# EAGLE board middleman pcb (EAGLE 9.5.0)
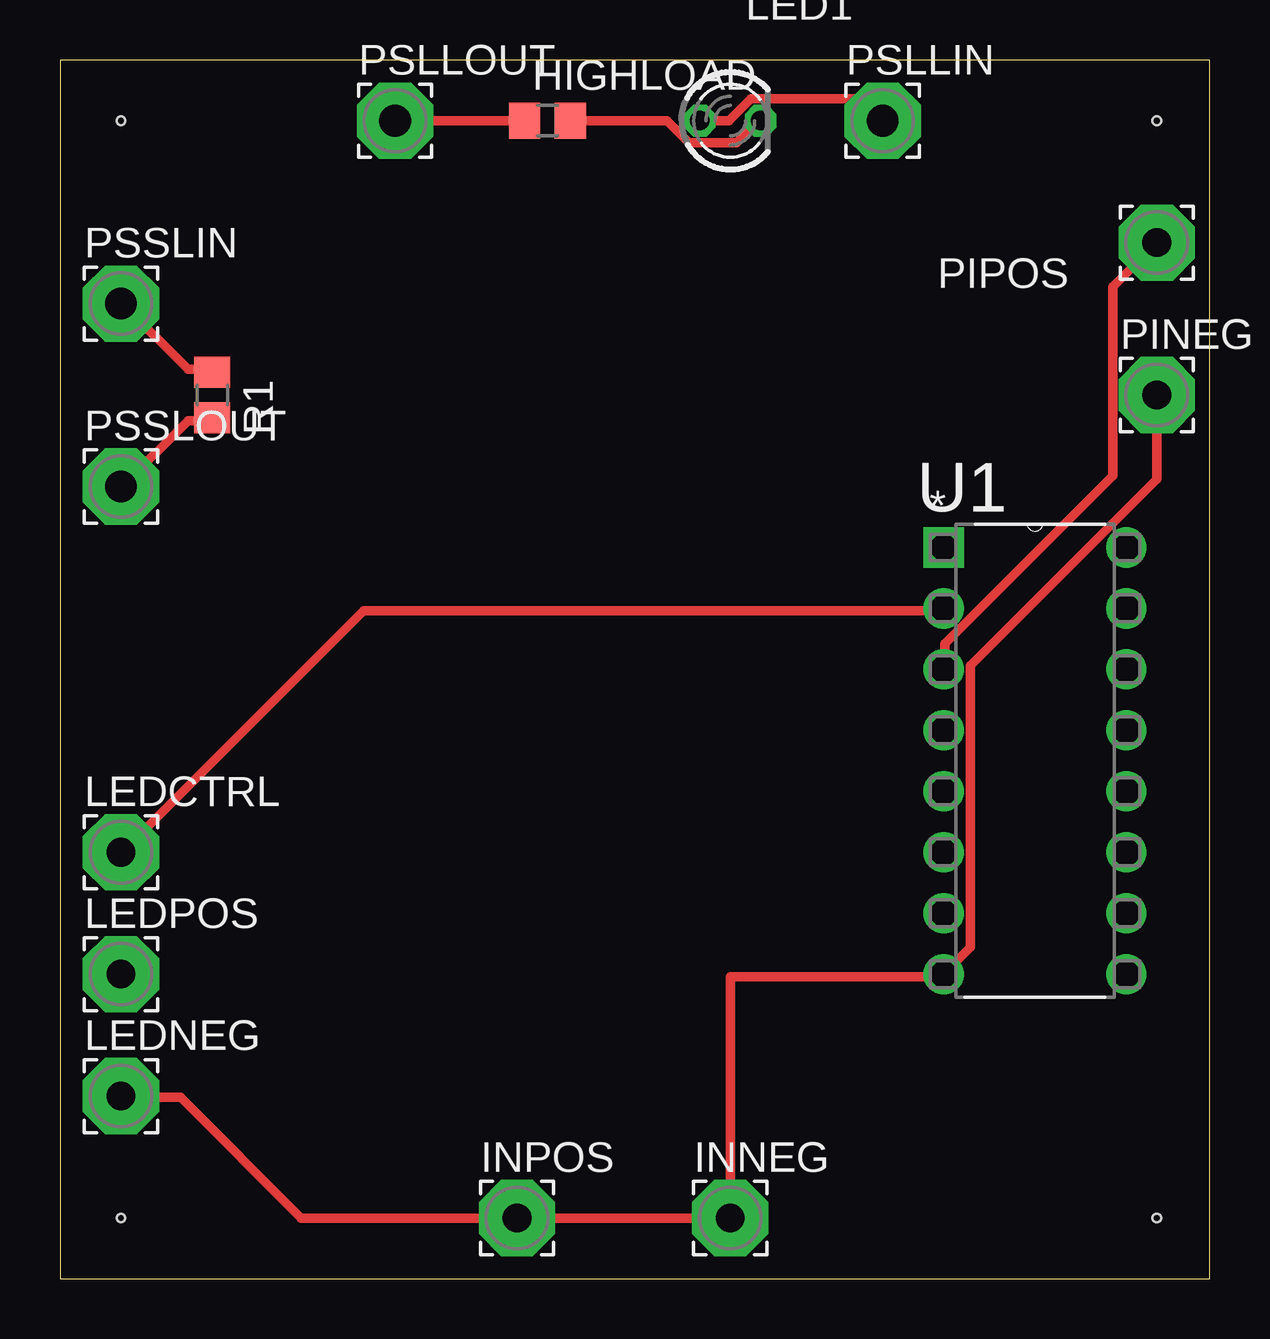
[diagram p0: board, top side]
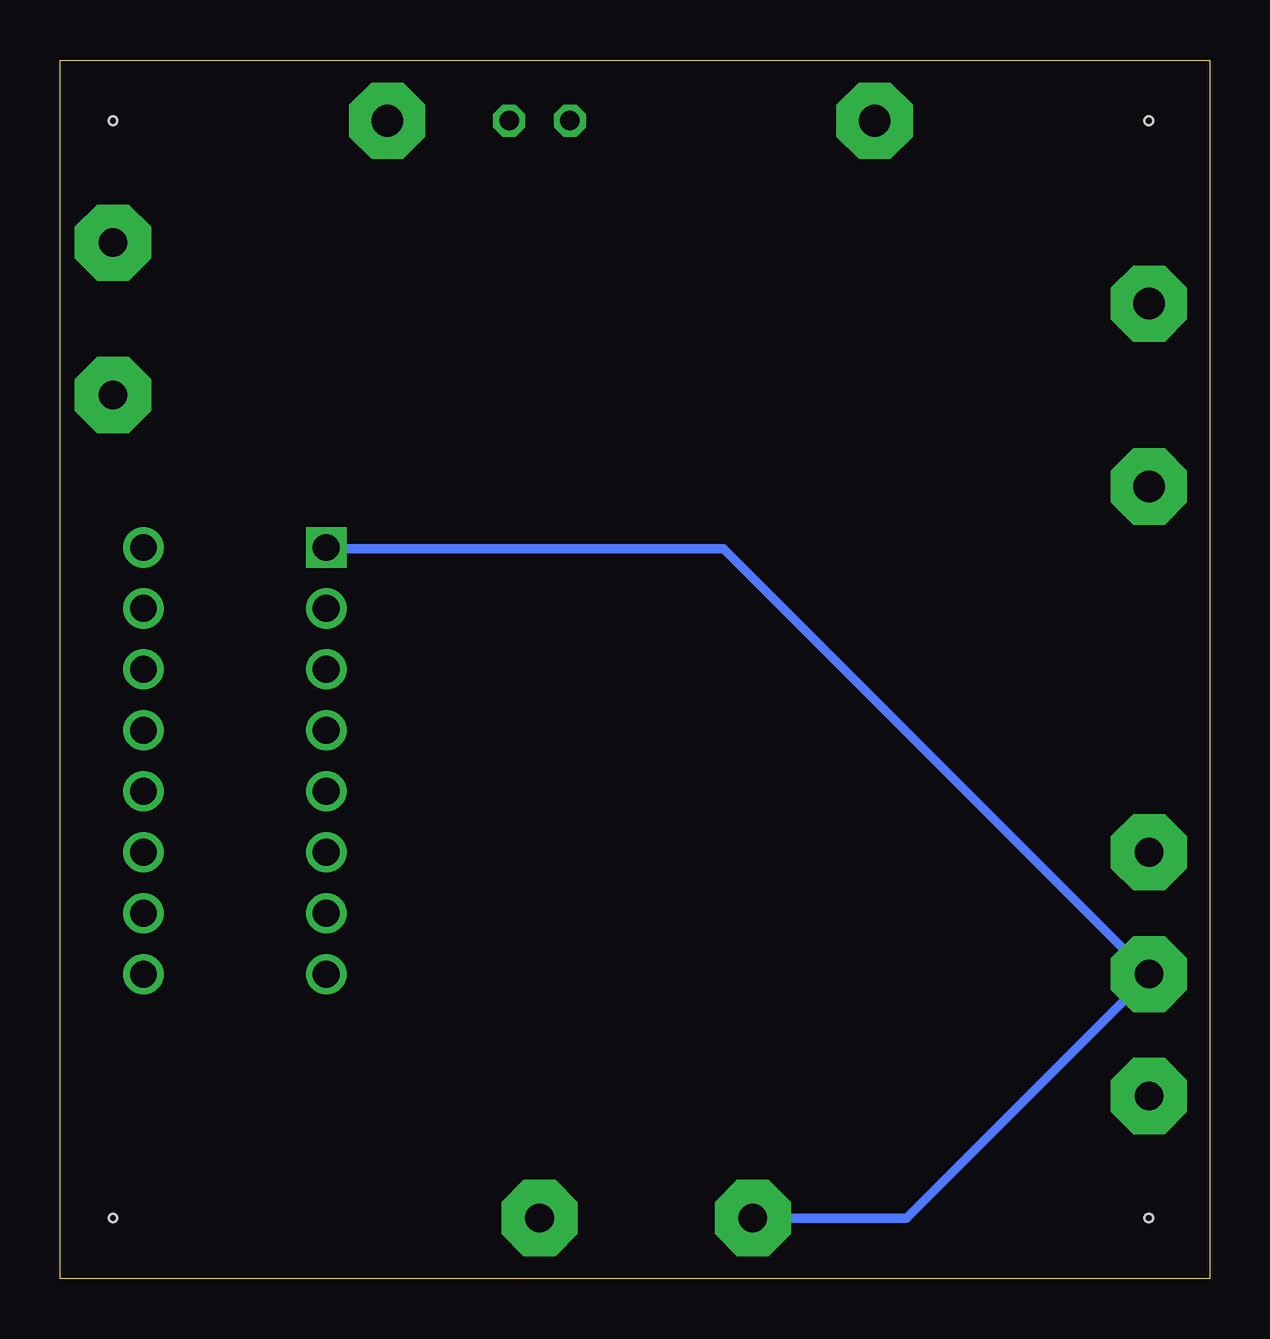
[diagram p1: board, bottom side, seen from below]

Size 47.93 x 50.79 mm. Coordinates in mm from the lower left corner, seen from the top.
Outline: 0,0 47.93,0 47.93,50.79 0,50.79 0,0
Copper layers (1*16): Top 0.035mm / dielectric 1.5mm / Bottom 0.035mm
Design rules "default": minimum track width 6mil, minimum drill 0.35mm, track to track 6mil, track to pad 6mil, pad to pad 6mil, via to via 6mil, smd to smd 6mil, copper to edge 40mil, drill to drill 6mil, minimum pad ring 10mil, minimum via ring 8mil, stop-mask expansion 4mil, vias tented up to drill 0mil, thermal gap 10mil
Holes 0.35 mm at 2.54,48.26 45.72,48.26 45.72,2.54 2.54,2.54

## Footprints (pad centres in the part's own frame; a part is rotated, then mirrored left to right if it is on the bottom)
R0805 = smd 1.3 x 1.5: 1 -0.95,0; 2 0.95,0
3,17/1,2 = drill 1.194 pad 3.175 octagon: 1 0,0
LED3MM = drill 0.813 octagon: A -1.27,0; K 1.27,0
3,17/1,3 = drill 1.321 pad 3.175 octagon: 1 0,0
DIP254P762X508-16 = drill 1.118 square: 1 -7.62,17.78 | drill 1.118: 2 -7.62,15.24; 3 -7.62,12.7; 4 -7.62,10.16; 5 -7.62,7.62; 6 -7.62,5.08; 7 -7.62,2.54; 8 -7.62,0; 9 0,0; 10 0,2.54; 11 0,5.08; 12 0,7.62; 13 0,10.16; 14 0,12.7; 15 0,15.24; 16 0,17.78

## Placement (x,y rotation side)
HIGHLOAD  220 OHMS  [R0805]  20.32,48.26 0 top
INNEG  WIREPAD3,17/1,2  [3,17/1,2]  27.94,2.54 0 top
INPOS  WIREPAD3,17/1,2  [3,17/1,2]  19.05,2.54 0 top
LED1  [LED3MM]  27.94,48.26 0 top
LEDCTRL  WIREPAD3,17/1,2  [3,17/1,2]  2.54,17.78 0 top
LEDNEG  WIREPAD3,17/1,2  [3,17/1,2]  2.54,7.62 0 top
LEDPOS  WIREPAD3,17/1,2  [3,17/1,2]  2.54,12.7 0 top
PINEG  WIREPAD3,17/1,2  [3,17/1,2]  45.72,36.83 0 top
PIPOS  WIREPAD3,17/1,2  [3,17/1,2]  45.72,43.18 0 top
PSLLIN  WIREPAD3,17/1,3  [3,17/1,3]  34.29,48.26 0 top
PSLLOUT  WIREPAD3,17/1,3  [3,17/1,3]  13.97,48.26 0 top
PSSLIN  WIREPAD3,17/1,3  [3,17/1,3]  2.54,40.64 0 top
PSSLOUT  WIREPAD3,17/1,3  [3,17/1,3]  2.54,33.02 0 top
R1  4 OHMS  [R0805]  6.35,36.83 270 top
U1  CD4050BE  [DIP254P762X508-16]  44.45,12.7 0 top

## Library data of the parts
HIGHLOAD R1 = rcl; SPICEPREFIX: R
INNEG INPOS LEDCTRL LEDNEG LEDPOS PINEG PIPOS PSLLIN PSLLOUT PSSLIN PSSLOUT = wirepad
LED1 = led
U1 = CD4050BE; AVAILABILITY: Unavailable; MF: Texas Instruments; MP: CD4050BE; PACKAGE: DIP-16 Intersil; PRICE: None

## Nets
N$1: INPOS.1 LEDPOS.1 U1.1
N$2: LEDCTRL.1 U1.2
N$3: PIPOS.1 U1.3
N$4: LED1.A PSLLIN.1
N$5: INNEG.1 LEDNEG.1 PINEG.1 U1.8
N$6: HIGHLOAD.2 LED1.K
N$7: HIGHLOAD.1 PSLLOUT.1
N$8: PSSLIN.1 R1.1
N$9: PSSLOUT.1 R1.2

## Tracks (layer width: path | path; a pad name or v marks a point on that pad's centre or on a via)
N$1
  Bottom 0.4: U1.1 36.73,30.43 20.27,30.43 LEDPOS.1 2.59,12.6 12.65,2.54 INPOS.1
N$2
  Top 0.01: 36.73,27.84 U1.2 | 2.59,17.78 LEDCTRL.1
  Top 0.4: 36.73,27.84 12.65,27.84 2.59,17.78
N$3
  Top 0.01: 36.88,25.4 U1.3
  Top 0.4: 36.88,25.4 36.88,26.47 43.89,33.48 43.89,41.35 PIPOS.1
N$4
  Top 0.4: LED1.A 27.89,48.26 28.8,49.17 33.38,49.17 PSLLIN.1
N$5
  Top 0.01: 2.59,7.57 LEDNEG.1
  Top 0.4: 2.59,7.57 5.03,7.57 10.06,2.54 INNEG.1 27.94,12.6 36.73,12.6 U1.8 37.95,13.82 37.95,25.55 45.72,33.33 PINEG.1
N$6
  Top 0.4: HIGHLOAD.2 25.3,48.26 26.21,47.35 28.19,47.35 29.11,48.26 LED1.K
N$7
  Top 0.4: PSLLOUT.1 HIGHLOAD.1
N$8
  Top 0.01: 6.25,37.9 R1.1
  Top 0.4: 6.25,37.9 5.33,37.9 2.59,40.64 PSSLIN.1
N$9
  Top 0.01: 6.25,35.76 R1.2
  Top 0.4: 6.25,35.76 5.33,35.76 2.59,33.02 PSSLOUT.1